# EAGLE board WattMeter_v3 (EAGLE 8.2.1)
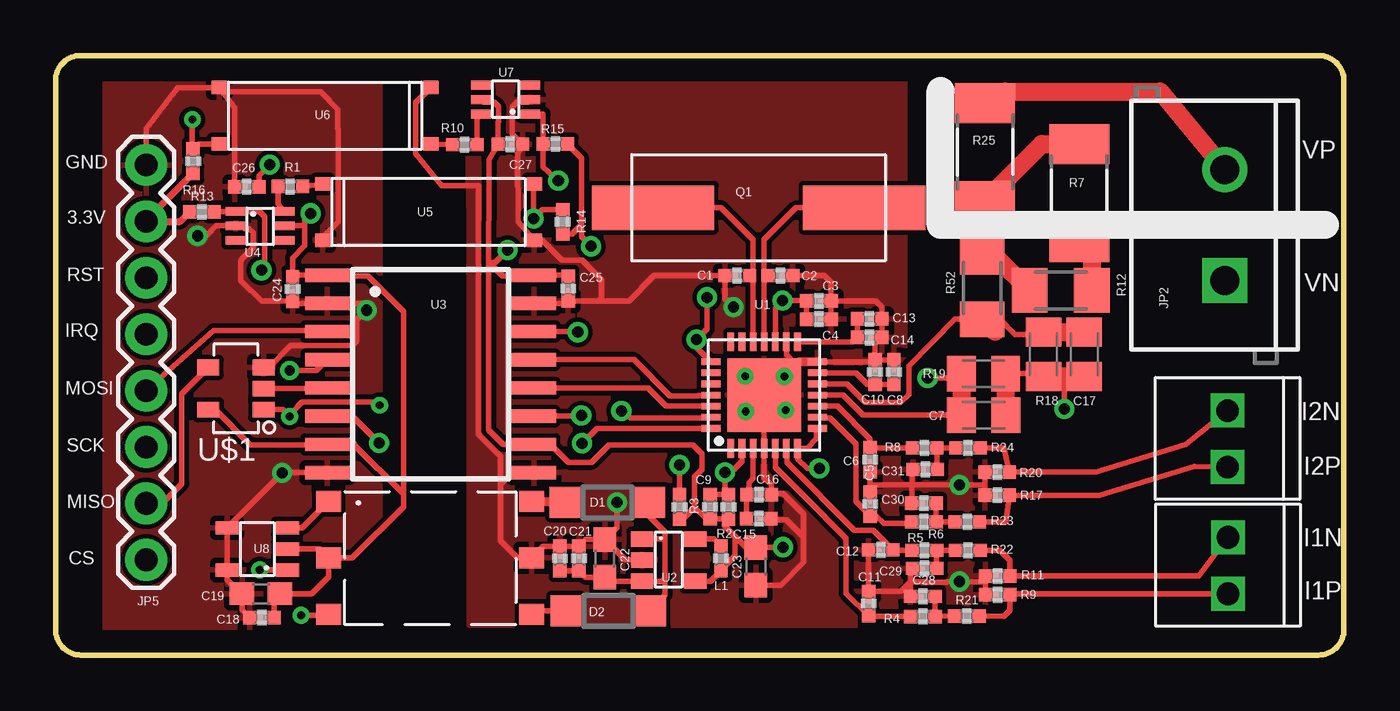
[diagram p0: board, top side]
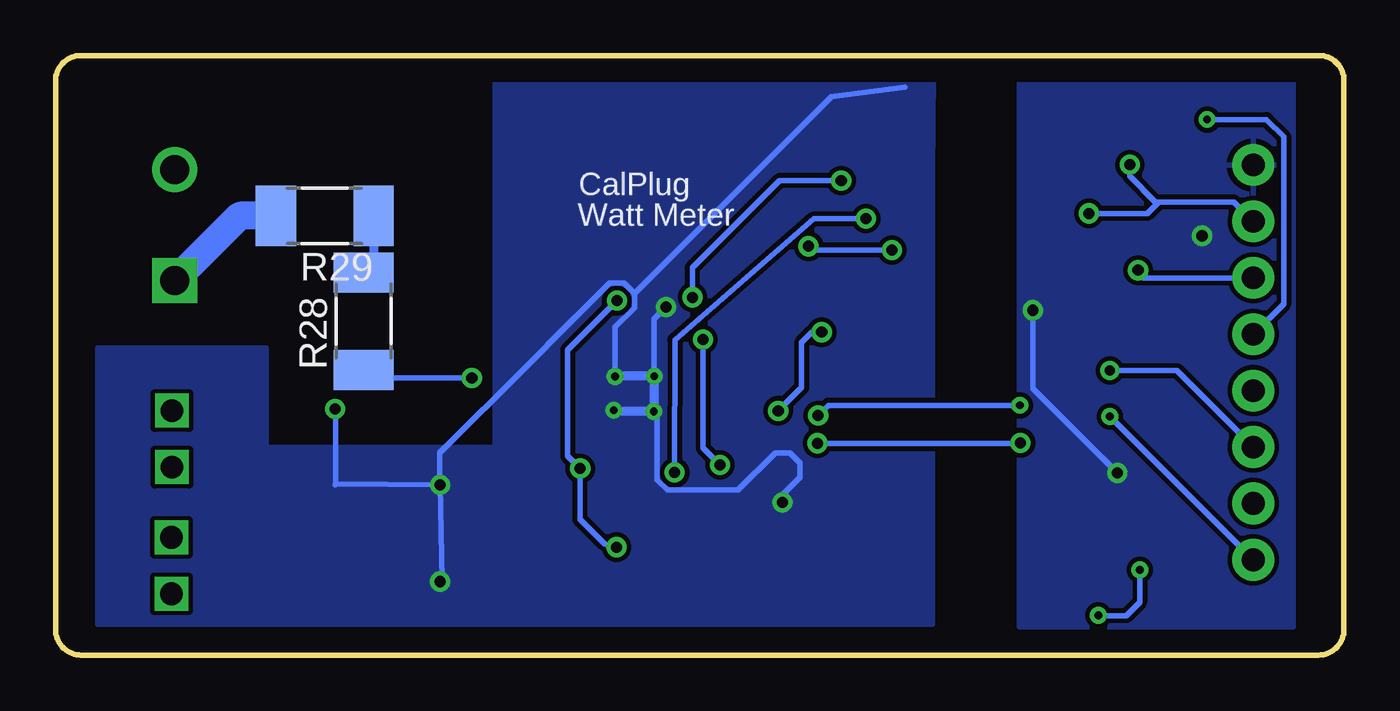
[diagram p1: board, bottom side, seen from below]

Size 58 x 27 mm. Coordinates in mm from the lower left corner, seen from the top.
Outline: 1.15,0 56.84,0 arc90 58,1.16 58,25.86 arc90 56.86,27 1.12,27 arc90 0,25.88 0,1.15 arc90 1.15,0
Copper layers (1*16): Top 0.035mm / dielectric 1.5mm / Bottom 0.035mm
Design rules "default *": minimum track width 10mil, minimum drill 15mil, track to track 8mil, track to pad 8mil, pad to pad 8mil, via to via 8mil, smd to smd 8mil, copper to edge 40mil, drill to drill 8mil, minimum pad ring 10mil, minimum via ring 8mil, stop-mask expansion 4mil, vias tented up to drill 0mil, thermal gap 10mil
Net classes: 0 default: clearance 0.205 mm; 1 HIGHVOLTAGE: width 0.254 mm, drill 0.508 mm, clearance 2.413 mm to class 0, clearance 0.152 mm; 2 ic: width 0.152 mm, drill 0.305 mm, clearance 0.205 mm to class 0, clearance 2.413 mm to class 1, clearance 0.205 mm

## Footprints (pad centres in the part's own frame; a part is rotated, then mirrored left to right if it is on the bottom)
0402-CAP = smd 0.6 x 0.6: 1 -0.55,0; 2 0.55,0
C0805K = smd 1.3 x 1.6: 1 -1,0; 2 1,0
C0603 = smd 1.1 x 1: 1 -0.85,0; 2 0.85,0
SOD123 = smd 1.4 x 1.4: A 1.9,0; C -1.9,0
SCREWTERMINAL-5MM-2 = drill 1.3 pad 2.032 square: 1 0,0 | drill 1.3 pad 2.032: 2 5,0
1X02_2.54_SCREWTERM = drill 1.016 square: P1 2.54,0; P2 0,0
1X08_ROUND = drill 1.016 pad 1.88: 1 0,0; 2 2.54,0; 3 5.08,0; 4 7.62,0; 5 10.16,0; 6 12.7,0; 7 15.24,0; 8 17.78,0
0402-RES = smd 0.6 x 0.6: 1 -0.55,0; 2 0.55,0
HC-49S = smd 5.5 x 2: 1 -4.75,0; 2 4.75,0
R2010 = smd 1.8 x 2.7: 1 -2.2,0; 2 2.2,0
M1206 = smd 1.6 x 2: 1 -1.4,0; 2 1.4,0
C0805K@1 = smd 1.3 x 1.6: 1 -1,0; 2 1,0
28-WFQFN = smd 0.85 x 0.3: 1 -2.4,1.5; 2 -2.4,1; 3 -2.4,0.5; 4 -2.4,0; 5 -2.4,-0.5; 6 -2.4,-1; 7 -2.4,-1.5; 15 2.4,-1.5; 16 2.4,-1; 17 2.4,-0.5; 18 2.4,0; 19 2.4,0.5; 20 2.4,1; 21 2.4,1.5 | smd 0.3 x 0.85: 8 -1.5,-2.4; 9 -1,-2.4; 10 -0.5,-2.4; 11 0,-2.4; 12 0.5,-2.4; 13 1,-2.4; 14 1.5,-2.4; 22 1.5,2.4; 23 1,2.4; 24 0.5,2.4; 25 0,2.4; 26 -0.5,2.4; 27 -1,2.4; 28 -1.5,2.4 | smd 3.3 x 3.3: PAD 0,0
TSOT25 = smd 0.7 x 1: 1 0,0; 2 0.95,0; 3 1.9,0; 4 1.9,2.4; 5 0,2.4
16-SOIC = smd 2 x 0.6: 1 0,8.89; 2 0,7.62; 3 0,6.35; 4 0,5.08; 5 0,3.81; 6 0,2.54; 7 0,1.27; 8 0,0; 9 9.3,0; 10 9.3,1.27; 11 9.3,2.54; 12 9.3,3.81; 13 9.3,5.08; 14 9.3,6.35; 15 9.3,7.62; 16 9.3,8.89
DCKT = smd 0.9 x 0.4: 1 0,1.3; 2 0,0.65; 3 0,0; 4 2.2,0; 5 2.2,0.65; 6 2.2,1.3
4-SMD = smd 0.7 x 0.6: 1 0,2.54; 2 0,0; 3 9.52,0; 4 9.52,2.54
SOT-23-5 = smd 0.6 x 1.05: 1 0,0; 2 0.95,0; 3 1.9,0; 4 1.9,2.7; 5 0,2.7
TRANSFO_3.3 = smd 1.12 x 0.96: 1 0,5.08; 2 0,2.54; 3 0,0; 4 9.14,0; 5 9.14,2.54; 6 9.14,5.08
TSOP-5 = smd 0.7 x 1: 1 0.95,1.25; 2 0,1.25; 3 -0.95,1.25; 4 -0.95,-1.25; 5 0.95,-1.25

## Placement (x,y rotation side)
C1  20p  [0402-CAP]  30.69,17.09 0 top
C2  20p  [0402-CAP]  32.63,17.09 180 top
C3  4.7u  [0402-CAP]  34.36,15.95 180 top
C4  0.1u  [0402-CAP]  34.36,15.13 180 top
C5  33n  [0402-CAP]  36.67,6.8 270 top
C6  33n  [0402-CAP]  36.67,8.8 270 top
C7  68nF  [C0805K]  41.78,10.81 0 top
C8  0.1u  [0402-CAP]  37.74,12.74 90 top
C9  1u  [0402-CAP]  29.47,6.68 270 top
C10  4.7u  [0402-CAP]  36.89,12.74 90 top
C11  33n  [0402-CAP]  36.6,2.32 270 top
C12  33n  [0402-CAP]  37.15,4.74 180 top
C13  4.7u  [0402-CAP]  36.65,15.14 180 top
C14  0.1u  [0402-CAP]  36.65,14.31 180 top
C15  4.7u  [0402-CAP]  31.66,6.14 180 top
C16  0.1u  [0402-CAP]  31.68,7.23 180 top
C17  68nF  [C0805K]  46.31,13.55 270 top
C18  0.1u  [0402-CAP]  9.29,1.69 0 top
C19  10uF TANT  [C0603]  9.25,2.77 180 top
C20  0.1u  [0402-CAP]  22.7,4.35 270 top
C21  1u  [0402-CAP]  23.56,4.35 270 top
C22  10uF  [C0603]  24.73,4.36 90 top
C23  10uF  [C0603]  31.52,4 270 top
C24  0.1u  [0402-CAP]  10.67,16.49 270 top
C25  0.1u  [0402-CAP]  23.08,16.5 90 top
C26  0.1u  [0402-CAP]  8.61,21.09 180 top
C27  0.1u  [0402-CAP]  20.47,23.01 0 top
C28  33n  [0402-CAP]  39.04,2.65 0 top
C29  33n  [0402-CAP]  39.12,3.91 180 top
C30  33n  [0402-CAP]  39.09,6.84 0 top
C31  33n  [0402-CAP]  39.15,8.36 180 top
D1  MBR0520LT  [SOD123]  24.84,6.88 180 top
D2  MBR0520LT  [SOD123]  24.89,1.99 180 top
JP2  [SCREWTERMINAL-5MM-2]  52.63,16.86 90 top
JP3  [1X02_2.54_SCREWTERM]  52.78,5.3 270 top
JP4  [1X02_2.54_SCREWTERM]  52.76,11.01 270 top
JP5  [1X08_ROUND]  4.08,4.29 90 top
L1  15nH  [0402-RES]  29.96,4.35 270 top
Q1  QUARTZ_3.58M_2PIN  [HC-49S]  31.65,20.14 0 top
R1  560  [0402-RES]  10.57,21.1 180 top
R2  10k  [0402-RES]  30.29,6.68 90 top
R3  10k  [0402-RES]  28.09,6.68 90 top
R4  1k  [0402-RES]  39.04,1.74 180 top
R5  1k  [0402-RES]  39.11,4.72 180 top
R6  1k  [0402-RES]  39.09,6 180 top
R7  220k  [R2010]  46.08,20.81 90 top
R8  1k  [0402-RES]  39.12,9.33 180 top
R9  51  [0402-RES]  42.41,2.72 0 top
R10  560  [0402-RES]  18.42,22.99 0 top
R11  51  [0402-RES]  42.41,3.56 180 top
R12  120k  [M1206]  45.25,16.42 0 top
R13  10k  [0402-RES]  6.59,19.96 180 top
R14  10k  [0402-RES]  22.83,19.51 270 top
R15  10k  [0402-RES]  22.5,23.02 0 top
R16  4.7k  [0402-RES]  6.19,22.25 270 top
R17  51  [0402-RES]  42.39,7.2 0 top
R18  499R  [C0805K@1]  44.47,13.55 270 top
R19  499R  [C0805K@1]  41.77,12.67 0 top
R20  51  [0402-RES]  42.39,8.24 180 top
R21  100  [0402-RES]  41.03,1.76 180 top
R22  100  [0402-RES]  41.07,4.72 180 top
R23  100  [0402-RES]  41.04,6 180 top
R24  100  [0402-RES]  41.08,9.33 180 top
R25  220k  [R2010]  41.84,22.65 90 top
R28  220k  [R2010]  44.13,15.03 90 bottom
R29  220k  [R2010]  45.88,19.78 180 bottom
R52  120k  [M1206]  41.71,16.53 90 top
U1  ADE7953  [28-WFQFN]  31.9,11.71 90 top
U2  PAM2305  [TSOT25]  26.4,5.23 270 top
U3  ISO7241  [16-SOIC]  12.23,8.22 0 top
U4  SN74LVC  [DCKT]  8.11,18.68 0 top
U5  PS2505  [4-SMD]  12.03,18.68 0 top
U6  PS2505  [4-SMD]  16.89,25.56 180 top
U7  SN74LVC  [DCKT]  21.36,25.66 180 top
U8  SN6501  [SOT-23-5]  10.43,3.83 90 top
U9  TRANSFO_3.3  [TRANSFO_3.3]  12.29,1.84 0 top
U$1  BUFFER-NL17SZ125  [TSOP-5]  8.12,12 270 top

## Library data of the parts
C1-C6 C8-C16 C18 C20 C21 C24-C31 L1 R1-R6 R8-R11 R13-R17 R20-R24 = Nizanlib
C7 C17 C19 C22 C23 R7 R12 R18 R19 R25 R28 R29 R52 = resistor
D1 D2 = diode
JP2 = SparkFun-Connectors; STOREFRONT_ID: PRT-08432
JP3-JP5 = SparkFun-Connectors
Q1 = CalPlug; DIGIKEY: http://www.digikey.com/product-detail/en/txc-corporation/9C-3.579545MBBK-T/887-2450-1-ND/4475440
U1 U8 = CalPlug
U2 = Damien_regulator
U3-U7 = Damien_divers
U9 = Damien_power
U$1 = arducoder

## Nets
CS: JP5.1 U3.11 U$1.1
CS_ISO: U1.28 U3.6
GND: C18.1 C19.2 C24.2 C26.2 JP5.8 U3.2 U3.8 U4.2 U5.2 U6.3 U8.4 U8.5 U$1.3
GNDI: C1.1 C2.1 C3.1 C4.1 C5.1 C6.2 C7.2 C8.2 C10.2 C11.1 C12.2 C13.1 C14.1 C15.1 C16.1 C17.2 C20.1 C21.1 C22.2 C23.2 C25.1 C27.2 C28.1 C29.2 C30.1 C31.2 R9.1 R11.2 R17.1 R18.2 R19.2 R20.2 U1.4 U1.14 U1.16 U1.PAD U2.2 U3.9 U3.15 U5.3 U6.2 U7.2 U9.5
I1N: JP3.P2 R11.1 R22.1
I1P: JP3.P1 R9.2 R21.1
I2N: JP4.P2 R20.1 R24.1
I2P: JP4.P1 R17.2 R23.1
IRQ: JP5.5 R16.1 U6.4
IRQ_ISO: R3.2 R15.1 U1.22 U7.1
MISO: U3.5 U$1.2
MISO_ISO: U1.26 U3.12
MISO_OUT: JP5.2 U$1.4
MOSI: JP5.4 U3.3
MOSI_ISO: U1.27 U3.14
N$1: C1.2 Q1.1 U1.19
N$2: C2.2 Q1.2 U1.18
N$3 [ic]: C7.1 R19.1 R28.1 U1.11
N$4: L1.1 U2.5
N$7: C8.1 C10.1 U1.13
N$8: C13.2 C14.2 U1.15
N$10: C12.1 R5.2 U1.6
N$11: C11.2 R4.2 U1.5
N$12: C15.2 C16.2 U1.3
N$14: R12.1 R52.2
N$15: R7.1 R12.2
N$17: R7.2 R25.1
N$18: D1.A U9.6
N$19: C20.2 C21.2 C22.1 D1.C D2.C U2.1 U2.3
N$20: D2.A U9.4
N$21: U8.3 U9.1
N$23: U8.1 U9.3
N$24: C28.2 R4.1 R21.2
N$25: R1.1 U5.1
N$26: R1.2 U4.6
N$27: C29.1 R5.1 R22.2
N$28: C6.1 R8.2 U1.10
N$29: R10.1 U6.1
N$30: R10.2 U7.6
N$32: C5.2 R6.2 U1.9
N$33: C30.2 R6.1 R23.2
N$34: C31.1 R8.1 R24.2
N$35: R28.2 R29.1
RESET: JP5.6 R13.1 U4.1
RESET_ISO: C9.1 R2.2 R14.1 U1.2 U5.4
SCK: JP5.3 U3.4
SCK_ISO: U1.25 U3.13
V2P [ic]: C17.1 R18.1 R52.1 U1.12
VCC: C3.2 C4.2 C9.2 C23.1 C25.2 C27.1 L1.2 R2.1 R3.1 R14.2 R15.2 U1.7 U1.8 U1.17 U2.4 U3.10 U3.16 U7.5
VDD: C18.2 C19.1 C24.1 C26.1 JP5.7 R13.2 R16.2 U3.1 U3.7 U4.5 U8.2 U9.2 U$1.5
VN_IN: JP2.1 R29.2
VP_IN: JP2.2 R25.2

## Tracks (layer width: path | path; a pad name or v marks a point on that pad's centre or on a via)
CS  (via drill 0.35, 0.5)
  Top 0.254: 21.57,10.8 U3.11 23.64,10.76 v23.67,10.79 | U$1.1 10.23,11.05 v10.54,10.74 10.81,11.09 10.9,11.2 11.09,11.39 14.38,11.39 14.52,11.25 v14.59,11.25
  Top 0.406: 21.51,10.78 U3.11
  Bottom 0.254: v14.59,11.25 23.21,11.25 v23.67,10.79 | JP5.1 v10.54,10.74
CS_ISO  (via drill 0.5)
  Top 0.254: U3.6 13.36,10.76 v14.56,9.56 | v23.7,9.54 24.37,10.21 U1.28
  Bottom 0.254: v23.7,9.54 14.58,9.54 v14.56,9.56
GND  (via drill 0.5)
  Top 0.254: JP5.8 4.08,23.7 5.5,25.55 6.79,25.56 U6.3 | C26.2 8.06,24.64 U6.3 | v6.39,18.88 6.79,18.88 7.24,19.33 U4.2 8.39,19.33 8.51,19.21 8.7,19.21 8.89,19.02 8.89,18.34 8.37,17.82 8.37,17.78 8.34,17.75 8.34,16.87 9.27,15.94 C24.2 10.77,15.84 U3.2 13.98,15.84 v14,15.53 13.56,15.09 13.56,14.13 13.36,13.93 10.59,13.93 9.61,12.95 U$1.3 | U8.4 | U3.8 v10.21,8.22 v10.2,8.21 v10.2,8.2 U8.4 | U8.4 U8.5 7.73,3.39 8.4,2.72 C19.2 8.4,2.03 C18.1 | U5.2 12.03,18.82 12.71,19.5 12.71,23.69 12.71,23.74 12.71,24.58 11.94,25.38 7.32,25.38 U6.3
  Bottom 0.254: v14,15.53 14,12.01 v10.2,8.21
  pour Top: 2.24,26 14.61,26 14.61,1 2.24,1
  pour Bottom: 2.27,1.27 14.61,1.27 14.61,26 2.27,26
GNDI  (via drill 0.35, 0.5)
  Top 0.254: 32.23,6.16 C15.1 32.26,6.09 32.9,6.09 33.67,5.32 | C2.1 34.61,17.09 34.91,16.79 C3.1 | U3.15 22.97,15.84 C25.1 24.44,15.95 | C22.2 23.87,5.21 C21.1 C20.1 21.95,4.9 U9.5 20.79,4.38 20.03,5.14 20.03,7.67 | C22.2 25.66,4.28 U2.2 | 31.9,11.22 U1.4 31.9,7.98 32.23,7.65 C16.1 32.28,7.28 32.74,7.28 33.67,6.35 33.67,5.32 | U3.9 20.58,8.22 20.03,7.67 | U1.16 32.9,13.53 33.22,13.21 33.4,13.21 U1.14 36.81,13.21 C10.2 | C3.1 C4.1 | C10.2 36.89,14 C14.1 C13.1 | C10.2 C8.2 | C13.1 37.2,15.68 36.93,15.95 C3.1 | C13.1 | C31.2 38.54,8.4 38.54,7.66 | 38.54,7.66 C30.1 | 41.86,3.34 R9.1 | 41.86,3.34 R11.2 | 38.49,3.31 C28.1 | 38.49,3.31 38.49,3.83 C29.2 | v45.41,11.09 45.41,12.53 45.39,12.55 | R19.2 44.35,12.67 R18.2 | 38.54,7.66 40.44,7.66 40.45,7.67 v40.69,7.67 41.84,7.67 | 24.44,15.95 25.82,15.95 26.95,17.08 30.13,17.08 C1.1 30.14,16.05 v30.52,15.67 | 38.49,3.31 39.2,3.31 39.23,3.28 40.11,3.28 40.14,3.31 v40.69,3.31 41.83,3.31 41.86,3.34 | 38.49,3.31 38.05,2.87 C11.1 C12.2 | v25.27,6.88 25.27,5.75 C22.2 | 36.67,7.66 C6.2 | C5.1 36.67,7.66 | 38.54,7.66 36.67,7.66 | 24.44,15.95 24.58,16.09 24.58,16.91 23.71,17.78 22.81,17.78 21.91,18.68 U5.3 20.83,19.52 20.8,22.6 21.05,22.89 C27.2 20.99,23.05 20.55,23.49 20.58,24.7 20.77,24.89 21.24,24.89 U7.2 | v31.07,10.97 31.81,11.71 U1.PAD | U1.PAD 31.97,11.71 v32.81,12.55 | U1.PAD 32.19,11.71 v32.87,11.03 | R20.2 41.84,7.67 | 41.84,7.67 R17.1 | C23.2 32.65,3.15 33.67,4.17 33.67,5.32 | 20.03,7.67 20.03,8.95 19.04,9.94 19.04,17.49 19.04,17.68 19.04,17.87 19.05,21.13 18.33,21.14 17.37,21.14 16.21,22.58 16.21,24.87 U6.2
  Top 0.305: 33.4,13.21 33.4,12.72 33.25,12.56 | 33.25,12.56 31.9,11.22 | 32.9,12.91 33.25,12.56
  Top 0.406: U1.14 33.47,13.21 v32.81,12.55
  Top 0.813: C17.2 45.39,12.55 R18.2 | R19.2 C7.2
  Bottom 0.254: v45.41,11.09 45.43,11.07 45.39,11.03 45.39,7.7 | v40.69,7.67 45.39,7.7 | 45.39,7.7 45.42,7.67 | v25.27,6.88 25.27,7.22 24.49,8.01 24.49,8.65 24.95,9.11 25.59,9.11 27.27,7.44 30.46,7.44 30.91,7.9 30.91,10.81 v31.07,10.97 | 31.95,16.29 32.41,16.74 33.05,16.74 38.71,11.09 38.73,11.09 40.72,9.1 40.72,7.81 v40.69,7.67 | 31.95,16.29 31.95,15.64 32.81,14.77 v32.81,12.55 | v31.05,12.56 31.05,15.14 v30.52,15.67 | 19.76,25.57 23.08,25.15 31.95,16.29 | v40.69,7.67 40.61,3.39 v40.69,3.31
  Bottom 0.406: v32.81,12.55 v32.8,12.56 v31.05,12.56 31.05,10.99 v31.07,10.97 32.81,10.97 v32.87,11.03
  pour Bottom (isolate 0.15): 18.48,26.2 38.22,26.2 38.22,9.36 48.51,9.36 48.51,13.84 56.1,13.84 56.1,1.39 18.53,1.39 18.53,21.68
  pour Top: 18.49,26.11 38.23,26.11 38.23,9.41 48.46,9.41 48.46,13.83 55.95,13.83 56.06,13.83 56.06,1.34 18.62,1.34 18.62,19.59
I1N
  Top 0.254: R22.1 42.51,4.72 42.96,4.27 R11.1 51.47,3.56 JP3.P2
I1P
  Top 0.254: R21.1 42.69,1.75 42.96,2.02 R9.2 43,2.76 JP3.P1
I2N
  Top 0.254: JP4.P2 50.89,9.48 46.86,8.26 R20.1 42.69,9.32 R24.1
I2P
  Top 0.254: R23.1 42.77,6 R17.2 46.98,7.2 51.27,8.5 JP4.P1
IRQ  (via drill 0.35)
  Top 0.254: v6.16,24.12 6.16,22.83 R16.1 6.41,23.02 U6.4
  Bottom 0.254: v6.16,24.12 3.49,24.12 2.72,23.35 2.72,15.81 JP5.5
IRQ_ISO  (via drill 0.5)
  Top 0.254: U7.1 21.95,24.36 21.95,23.8 R15.1 21.95,21.97 v22.63,21.37 | v28.09,8.56 R3.2 | v29.33,16.11 29.33,14.69 v28.85,14.21 28.85,13.86 U1.22
  Bottom 0.254: v22.63,21.37 25.41,21.37 29.33,17.45 v29.33,16.11 | v28.85,14.21 28.85,9.32 v28.09,8.56
MISO
  Top 0.254: U$1.2 12.2,12 U3.5
MISO_ISO
  Top 0.254: U3.12 26.66,12.03 27.47,11.22 29.49,11.22 U1.26
MISO_OUT
  Top 0.254: JP5.2 4.8,6.83 5.69,7.72 5.69,11.77 U$1.4
MOSI
  Top 0.254: JP5.4 4.31,12.12 7.12,14.61 12.19,14.61 U3.3 12.11,14.45
MOSI_ISO  (via drill 0.5)
  Top 0.254: U3.14 23.48,14.57 v23.51,14.54 | v25.47,11 25.54,11 25.87,10.69 28.92,10.69 28.94,10.69 29.48,10.69 U1.27
  Bottom 0.254: v23.51,14.54 23.95,14.54 24.42,14.07 24.42,12.05 v25.47,11
N$1
  Top 0.254: 26.86,19.43 Q1.1 29.97,20.14 31.4,18.71 31.4,17.25 C1.2 31.24,17 31.4,16.83 U1.19
N$2
  Top 0.254: 36.4,19.75 Q1.2 33.34,20.14 31.9,18.71 31.9,17.27 C2.2 31.9,16.91 31.9,15.99 U1.18
N$3  (via drill 0.5)
  Top 0.254: U1.11 35.44,11.71 36.34,10.81 C7.1 | v39.26,12.48 40.58,12.48 R19.1
  Top 0.813: R19.1 C7.1
  Bottom 0.254: v39.26,12.48 43.78,12.48 R28.1
N$4
  Top 0.254: U2.5 29.63,5.23 L1.1
N$7
  Top 0.254: U1.13 36.04,12.71 36.56,12.19 C10.1 C8.1
N$8
  Top 0.254: C13.2 C14.2 35.9,14.11 U1.15
N$10
  Top 0.254: 37.72,4.72 C12.1 | 37.72,4.72 R5.2 | 37.72,4.72 36.82,5.62 35.97,5.62 32.92,8.67 32.92,9.29 U1.6
N$11
  Top 0.254: 36.64,1.74 C11.2 | 36.64,1.74 R4.2 | U1.5 32.4,8.45 33.69,7.16 35.59,5.25 35.59,2.79 36.64,1.74
N$12
  Top 0.254: U1.3 31.4,7.95 31.21,7.76 31.21,7.31 C16.2 31.11,7.21 C15.2
N$14
  Top 0.813: R12.1 42.34,17.93 R52.2
N$15
  Top 0.813: R7.1 46.65,18.04 R12.2
N$17
  Top 0.813: R25.1 44.4,23.01 R7.2
N$18
  Top 0.406: U9.6 22.94,6.92 D1.A
N$19
  Top 0.254: C22.1 23.85,3.51 C21.2 C20.2 | 24.91,3.33 U2.3 27.3,3.33 27.44,3.47 | D2.C 26.76,1.77 arc-90 26.75,1.78 | 26.74,5.24 arc90 U2.1 27.43,5.23 27.44,5.22 | D2.C 26.81,2.01 | D2.C 26.75,2.03 27.44,2.72 27.44,3.47 | D1.C 26.74,6.24 27.44,5.54 27.44,5.22 | 27.44,5.22 27.44,3.47
  Top 0.406: C22.1 24.91,3.33
N$20
  Top 0.254: U9.4 21.53,1.74 21.78,1.99 D2.A
N$21
  Top 0.254: U9.1 11.1,5.73 U8.3
N$23  (via drill 0.35)
  Top 0.254: v9.19,3.84 U8.1 | v11.06,1.79 12.24,1.79 U9.3
  Bottom 0.254: v9.19,3.84 9.19,2.38 9.8,1.77 11.04,1.77 v11.06,1.79
N$24
  Top 0.254: R21.2 R4.1 C28.2
N$25
  Top 0.254: R1.1 U5.1
N$26
  Top 0.254: R1.2 10.03,20.31 U4.6
N$27
  Top 0.254: C29.1 R5.1 R22.2
N$28
  Top 0.254: C6.1 36.69,9.33 R8.2 | U1.10 35.19,11.21 36.67,9.73 C6.1 | 36.67,9.51 C6.1
N$29
  Top 0.254: U6.1 R10.1
N$30
  Top 0.254: U7.6 18.97,24.17 R10.2
N$32
  Top 0.254: U1.9 34.32,10.69 34.86,10.69 36.04,9.51 36.04,6.91 36.67,6.28 C5.2 36.96,6.25 37.28,5.93 38.47,5.93 R6.2
N$33
  Top 0.254: C30.2 R6.1 R23.2
N$34
  Top 0.254: C31.1 39.67,8.49 R8.1 R24.2
N$35
  Bottom 0.406: R29.1 43.68,17.68 R28.2
RESET  (via drill 0.5)
  Top 0.254: R13.1 8.11,19.96 U4.1 9.19,19.98 9.42,19.75 9.42,17.56 v9.27,17.33
  Bottom 0.254: JP5.6 9.03,16.99 v9.27,17.33
RESET_ISO  (via drill 0.5)
  Top 0.254: U1.2 30.9,8.72 30.4,8.22 v30.13,8.22 | R2.2 30.13,7.24 | v30.13,8.22 v30.12,8.21 | 30.11,7.22 R2.2 | U5.4 21.52,20.77 v21.52,19.66 21.92,20.06 R14.1 | R2.2 30.13,7.39 v30.13,8.22 | C9.1 R2.2
  Bottom 0.254: v30.13,8.22 30.12,14.2 23.85,19.65 v21.52,19.66
SCK  (via drill 0.45)
  Top 0.254: v10.54,12.81 11.74,12.81 U3.4
  Bottom 0.254: v10.54,12.81 7.52,12.81 JP5.3
SCK_ISO
  Top 0.254: U3.13 26.04,13.3 27.66,11.68 28.93,11.68 28.94,11.69 29.48,11.69 U1.25
V2P
  Top 0.254: U1.12 35.63,12.21 36.45,11.37 38.03,11.37 38.42,11.73 38.42,13.02 40.48,15.13 R52.1 42.5,15.13 43.19,14.44 44.36,14.44 R18.1
  Top 0.813: 42.29,14.55 R52.1 | R18.1 C17.1
VCC  (via drill 0.5)
  Top 0.254: U1.8 34.26,10.17 34.26,9.75 33.82,9.31 U1.7 | 29.28,6.13 C9.2 | 30.11,6.12 R2.1 30.11,6.13 | C4.2 C3.2 v32.73,15.96 32.4,15.63 U1.17 | R15.2 23.67,22.38 23.67,19.39 | 23.67,19.39 23.24,18.96 R14.2 | 27.96,6 R3.1 28.24,6.13 28.77,6.66 | C9.2 30.11,6.13 | 28.77,6.66 28.77,8.02 29.1,8.35 29.1,9.06 28.7,9.46 24.91,9.46 24.13,8.68 23.1,8.68 22.29,9.49 U3.10 20.14,9.49 19.5,10.13 19.5,17.68 | 28.77,6.66 29.3,6.13 C9.2 | 33.4,9.04 U1.7 | U1.7 33.4,8.84 33.84,8.4 v34.38,8.4 | 19.5,17.68 19.51,21.43 19.51,22.31 C27.1 19.92,24 19.94,24.02 19.94,24.7 19.75,24.89 19.28,24.89 U7.5 | C25.2 23.02,17.11 U3.16 21.49,17.07 20.12,17.07 19.51,17.68 | U2.4 29.49,3.33 L1.2 29.96,3.83 30.59,4.46 30.59,5.34 | 30.11,6.13 30.11,5.82 30.59,5.34 | 30.59,5.34 31.08,4.85 C23.1 32.48,4.85 v32.75,4.86 | 19.5,17.68 19.51,17.68 | 19.51,17.68 19.79,17.68 v20.35,18.24 | 23.67,19.39 23.67,18.84 v24.1,18.41
  Bottom 0.254: v32.73,15.96 34.94,13.75 34.94,8.96 v34.38,8.4 34.38,8.1 34.39,8.09 34.39,6.12 33.28,5.01 v32.75,4.86 | v20.35,18.24 23.93,18.24 v24.1,18.41
VDD  (via drill 0.5)
  Top 0.254: C26.1 9.16,21.6 v9.64,22.08 | U3.1 | U3.1 10.69,17.11 C24.1 10.67,17.89 11.22,18.44 11.22,19.33 | U9.2 13.36,4.38 15.66,6.68 15.66,7.25 | U3.1 12.28,17.06 14.06,17.06 15.66,15.46 15.66,7.25 | U8.2 11.89,4.78 U9.2 | C18.2 9.84,2.51 C19.1 11.54,2.77 12.29,3.52 U9.2 | R13.2 6.02,19.98 6.19,20.15 | 10.35,19.37 U4.5 11.22,19.33 | U$1.5 7.19,11.05 8.77,9.47 12.21,9.47 U3.7 | 11.22,19.33 11.22,19.63 v11.48,19.89 | 13.42,9.49 15.66,7.25
  Top 0.305: R16.2 4.08,19.59 JP5.7 5.61,19.53 R13.2 | U3.7 13.42,9.49
  Bottom 0.254: JP5.7 4.96,20.41 8.34,20.41 | 8.34,20.41 8.48,20.41 9.64,21.57 v9.64,22.08 | 8.34,20.41 8.86,19.89 v11.48,19.89
VN_IN
  Bottom 1.27: R29.2 49.71,19.78 JP2.1
VP_IN
  Top 0.813: JP2.2 49.73,25.38 42.75,25.38 42.22,24.85 R25.2

## Text on the board
tNames: VP | GND | 3.3V | RST | VN | IRQ | MOSI | I2N | SCK | I2P | MISO | I1N | CS | I1P
bNames: CalPlug | Watt Meter